# Altium PCB GUASUO2.PcbDoc
Units mm, origin at the board's own origin, x right, y up, seen from the top; angles counter-clockwise.
Board outline 152.4 x 101.6 mm, 2 copper layers (Top Layer, Bottom Layer); 63 components, 53 nets, 213 pads, 187 vias.
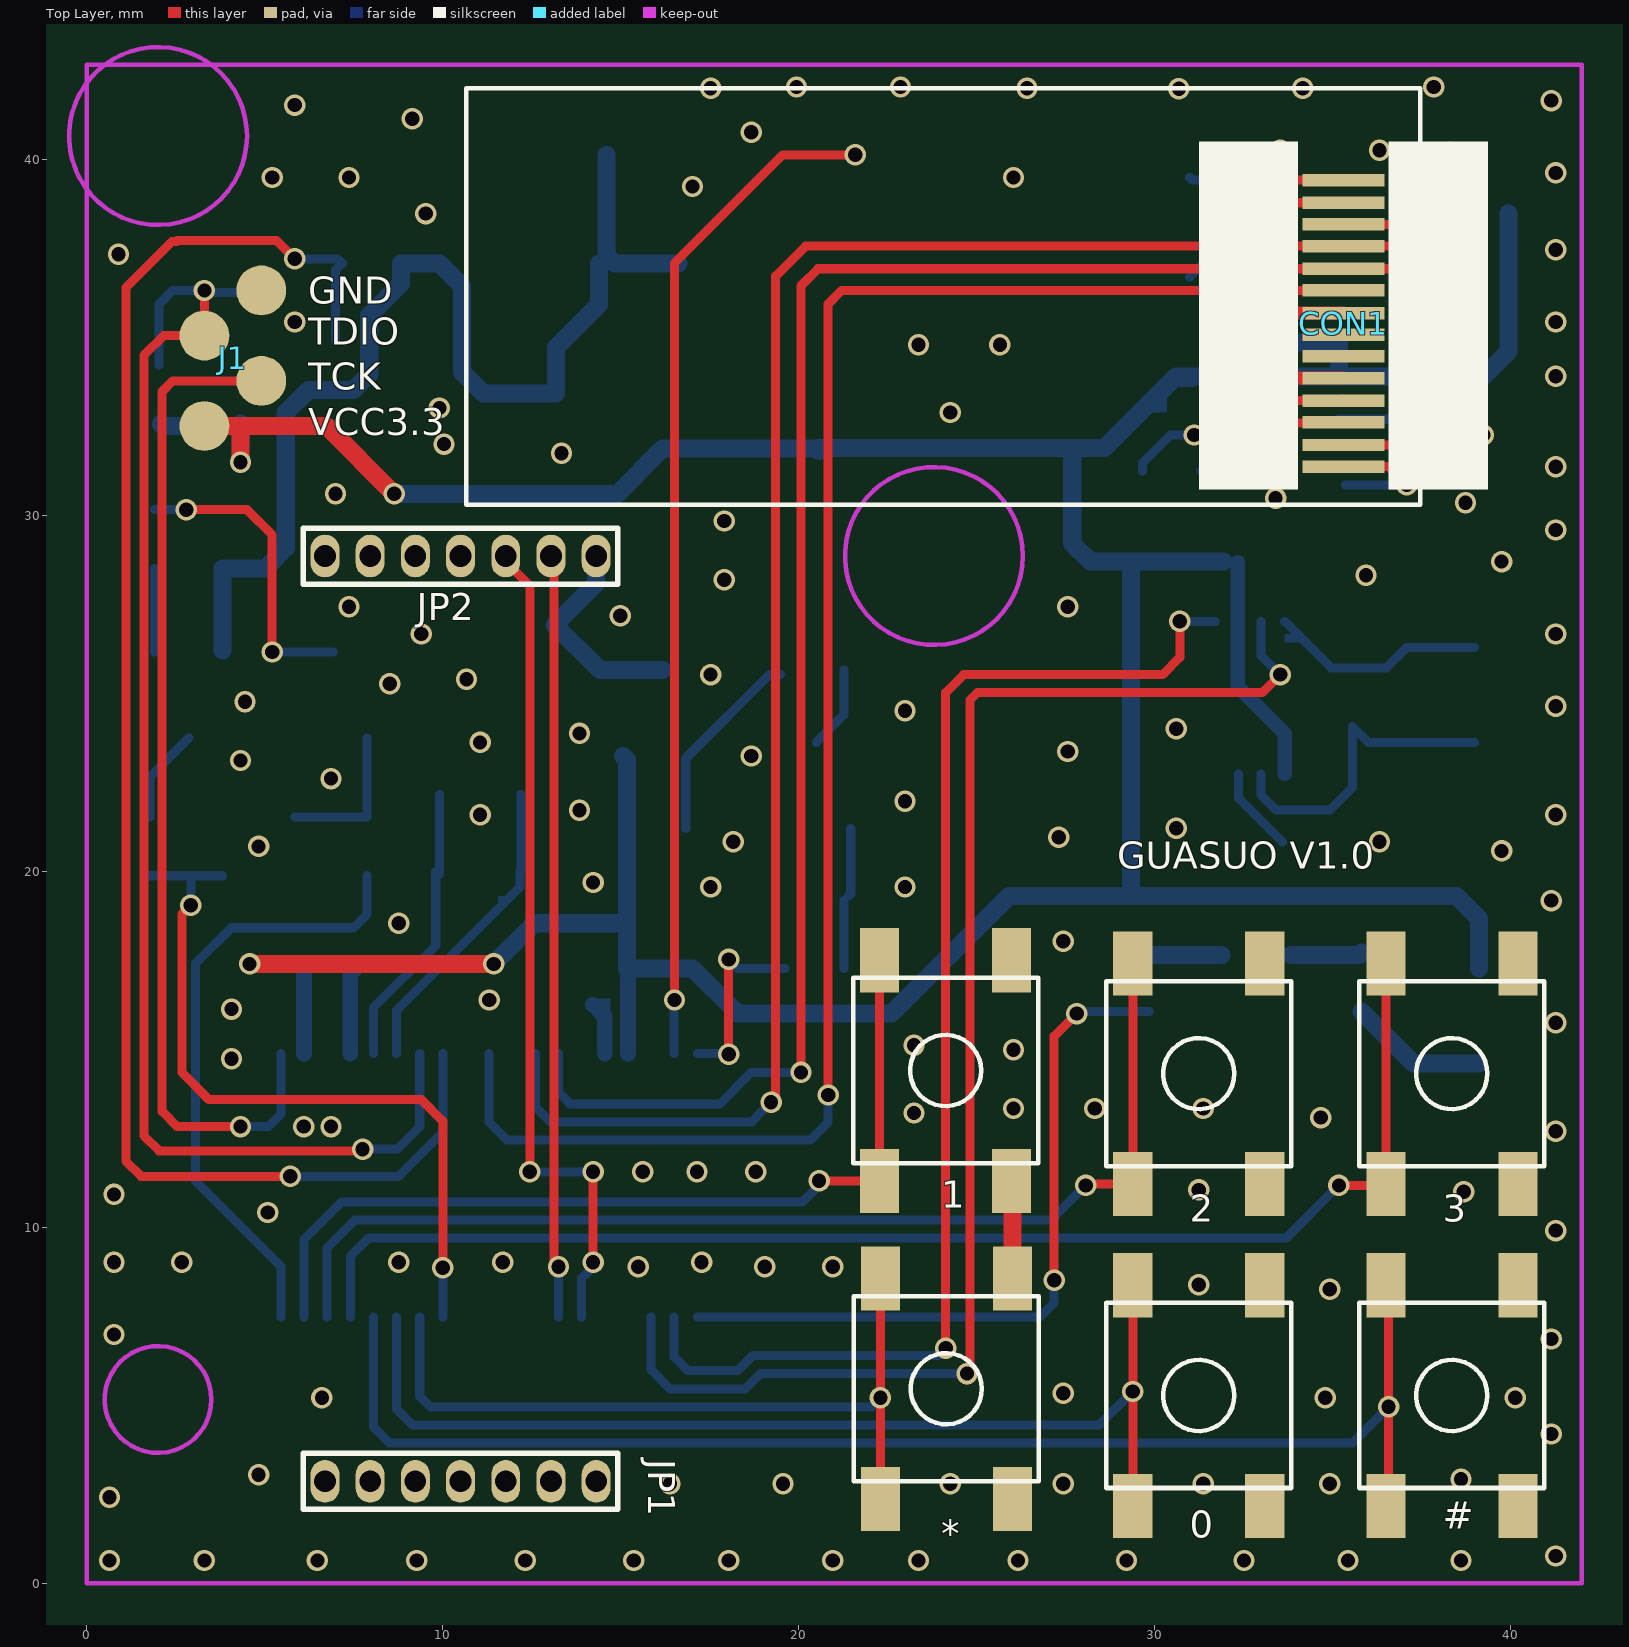
[diagram p0: Top Layer view]
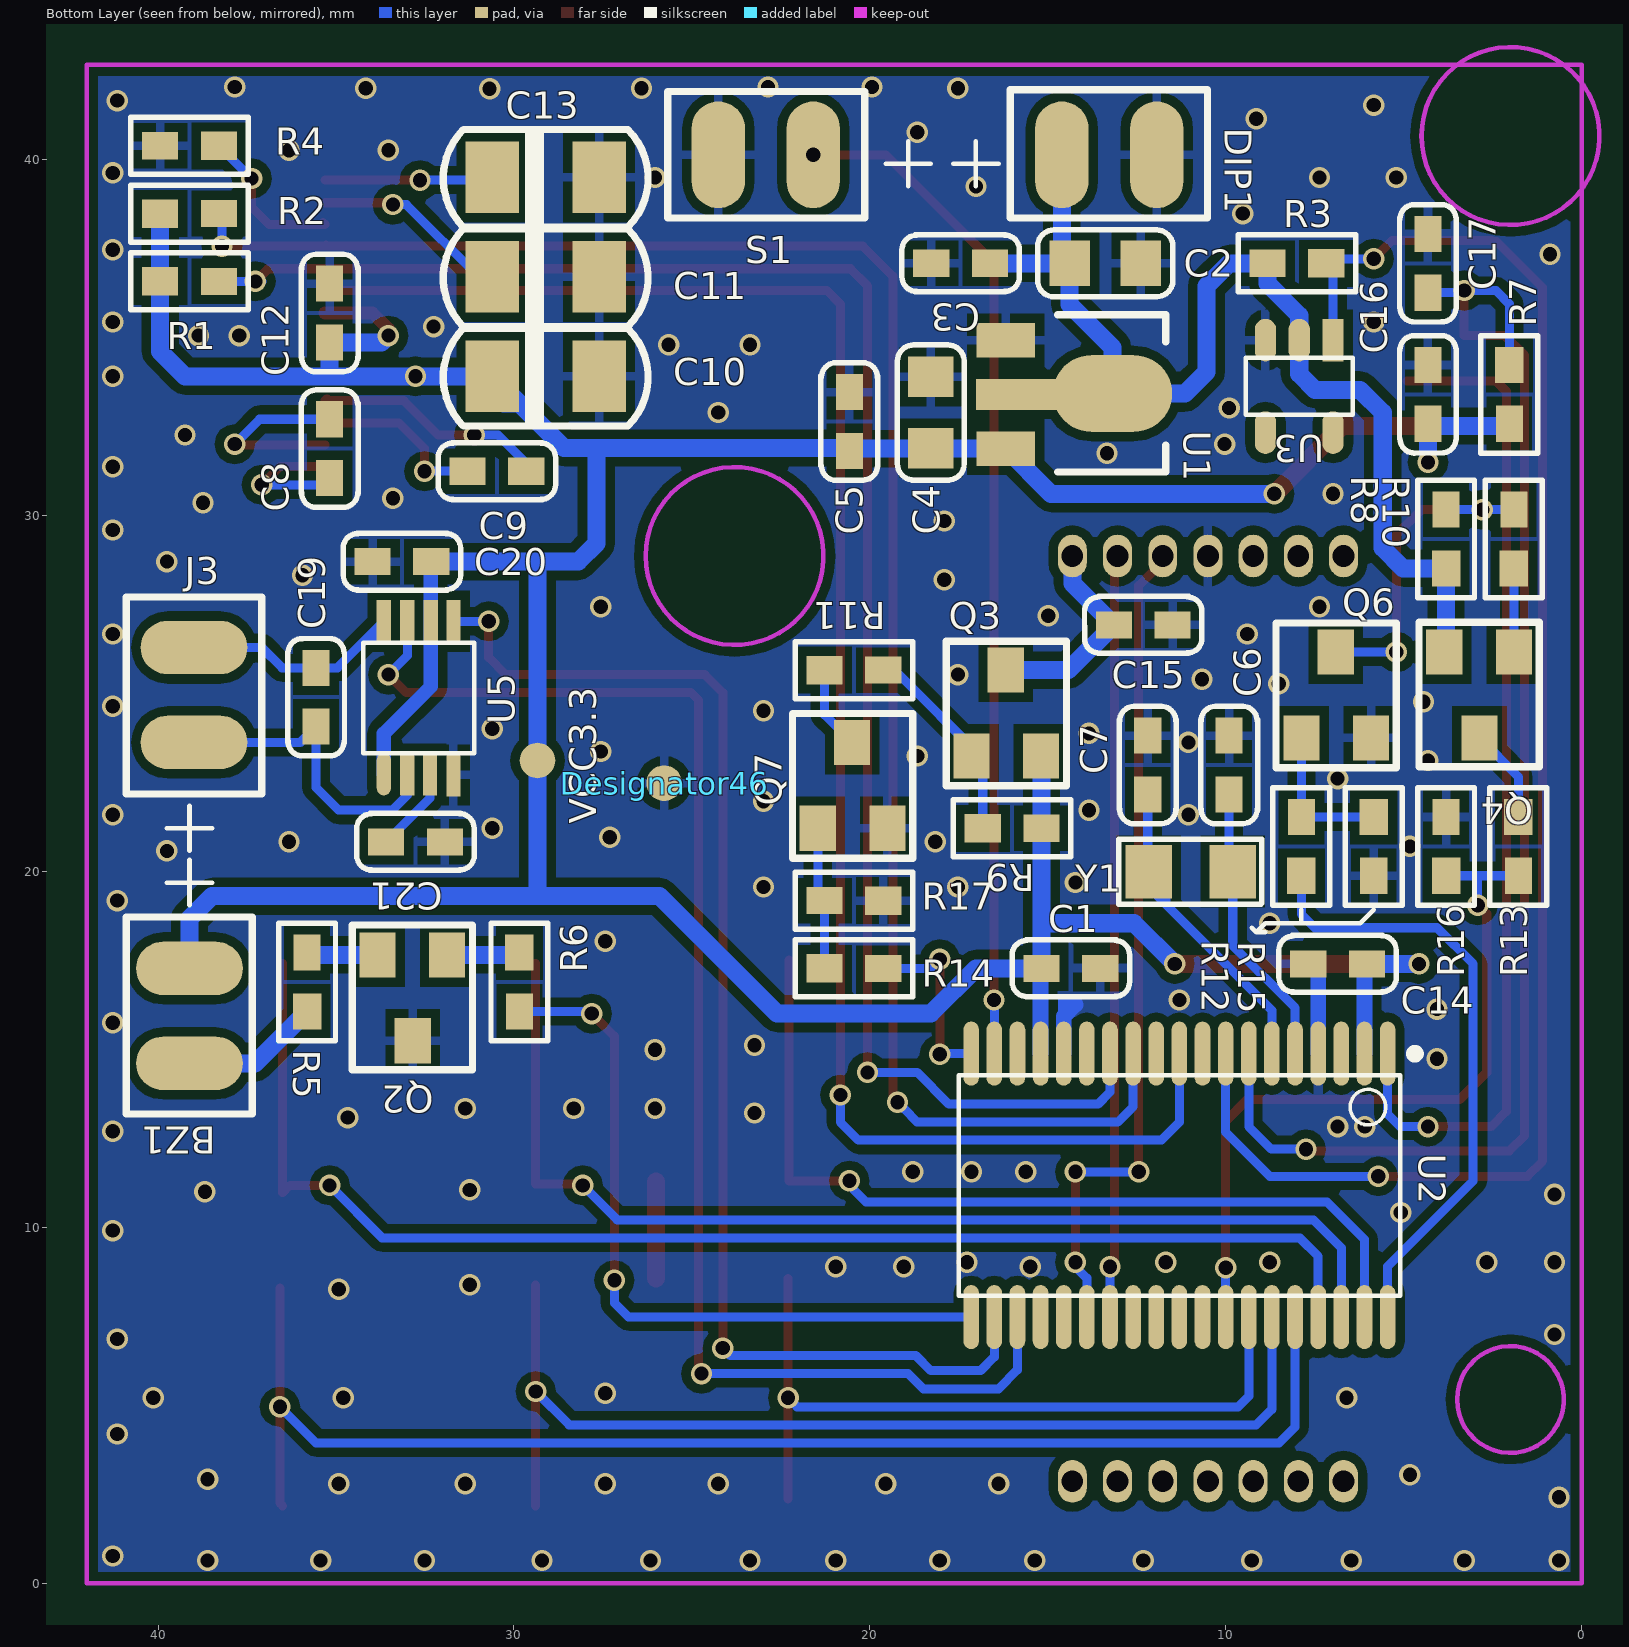
[diagram p1: Bottom Layer view, seen from below]

## Layer stack, top to bottom
Top Solder: solder mask 0.0102, Solder Resist, Dk 3.5
Top Layer: signal copper 0.0356
Dielectric1: dielectric 0.32, FR-4, Dk 4.8
Bottom Layer: signal copper 0.0356
Bottom Solder: solder mask 0.0102, Solder Resist, Dk 3.5

## Board outline
-56.007,-25.4 96.393,-25.4 96.393,76.2 -56.007,76.2

## Design rules (kind name [scope] priority, off if disabled: settings)
Clearance [All] p1: gap=0.254
ComponentClearance [All] p1: gap=0 collisioncheckmode=3 verticalgap=0 showdistances=FALSE
PolygonConnect PolygonConnect_1 [IsVia] p1: connectstyle=Direct reliefconductorwidth=0.254 reliefentries=4 polygonreliefangle="90 Angle" airgapwidth=0.254
PolygonConnect [All] p2: connectstyle=Relief reliefconductorwidth=0.254 reliefentries=4 polygonreliefangle="90 Angle" airgapwidth=0.254
RoutingVias [All] p1: holewidth=0.4 width=0.6 viastyle="Through Hole" minholewidth=0.025 minwidth=0.025 maxholewidth=1.27 maxwidth=1.27
SolderMaskExpansion [All] p1: expansion=0.102
UnpouredPolygon [All] p1: allowunpoured=FALSE
Width [All] p1: maxlimit=1.27 minlimit=0.025 preferedwidth=0.203
28 further rules are at their usual default settings.

## Classes and differential pairs
component class 挂锁-151103: 0 1 2 3 # BZ1 C1 C2 C3 C4 C5 C6 C7 C8 C9 C10 C11 C12 C13 C14 C15 C16 C17 C19 C20 C21 DIP1 J1 J3 JP1 JP2 Q2 Q3 Q4 Q6 Q7 R1 R2 R3 R4 R5 R6 R7 R8 R9 R10 R11 R12 R13 R14 R15 R16 R17 U1 U2 U3 U5 Y1

## Components (designator, comment, footprint, x,y, rotation, side; value= is the part's Value field where it differs from the comment)
0 "SW-PB" TS-030 31.242,5.272 r90 top locked (schematic designator S2)
1 "SW-PB" TS-030 24.13,14.403 r90 top locked (schematic designator S6)
2 "SW-PB" TS-030 31.242,14.314 r90 top locked (schematic designator S5)
3 "SW-PB" TS-030 38.354,14.314 r90 top locked (schematic designator S4)
# "SW-PB" TS-030 38.354,5.272 r90 top locked (schematic designator S3)
* "SW-PB" TS-030 24.151,5.461 r90 top locked (schematic designator S1)
BZ1 "BUZZER" 2PAD-9 39.116,17.272 r270 bottom
C1 "104" 0603C 14.351,17.272 r180 bottom
C2 "10uF" 0805C 13.384,37.084 r180 bottom
C3 "104" 0603C 17.448,37.084 r0 bottom
C4 "10uF" 0805C 18.288,32.893 r90 bottom
C5 "104" 0603C 20.574,32.639 r90 bottom
C6 "15P" 0603C 9.906,22.987 r90 bottom
C7 "15P" 0603C 12.192,22.987 r90 bottom
C8 "1UF" 0603C 35.179,31.877 r90 bottom
C9 "1UF" 0603C 30.48,31.242 r180 bottom
C10 "4.7UF" "10U/16V SMT-A" 30.607,33.909 r180 bottom
C11 "4.7uf" "10U/16V SMT-A" 30.607,36.703 r180 bottom
C12 "1uf" 0603C 35.179,35.687 r90 bottom
C13 "4.7uF" "10U/16V SMT-A" 30.607,39.497 r180 bottom
C14 "104" 0603C 6.858,17.399 r0 bottom
C15 "1UF" 0603c 12.319,26.924 r180 bottom
C16 "1UF" 0603C 4.318,33.401 r90 bottom
C17 "1P" 0603C 4.318,37.084 r90 bottom
C19 "1P" 0603C 35.56,24.892 r270 bottom
C20 "1uF" 0603C 33.147,28.702 r180 bottom
C21 "1uF" 0603C 32.766,20.828 r0 bottom
CON1 "FPC-14PIN-F" OLED-SMD-14 35.306,31.369 r180 bottom locked
Designator46 "Comment" TEST#1 24.765,22.352 r180 top
DIP1 "" 2PAD-9 14.605,40.132 r180 bottom
J1 "4PIN" PAD-1.27-4 3.302,32.512 r90 top
J3 "SIP2" 2PAD-9 38.989,23.622 r90 bottom
JP1 "CON7" PAD-1.27-7 10.5,2.86 r0 top locked
JP2 "CON7" PAD-1.27-7 10.5,28.86 r180 top locked
Q2 "BC857B" SOT-23 31.877,17.653 r0 bottom
Q3 "OA034" SOT-23-2 17.145,23.241 r180 bottom
Q4 "BC857B" SOT-23 1.905,26.162 r0 bottom
Q6 "BC847B" SOT-23 7.874,23.749 r180 bottom
Q7 "BC847B" SOT-23 21.463,21.209 r180 bottom
R1 "4.7K" 0603R 39.116,36.576 r0 bottom
R2 "4.7K" 0603R 39.116,38.481 r0 bottom
R3 "1M" 0603R 8.001,37.084 r180 bottom
R4 "390K" 0603R 39.116,40.386 r180 bottom
R5 "10Ω" 0603R 35.814,16.891 r270 bottom
R6 "1K" 0603R 29.845,16.891 r90 bottom
R7 "47K" 0603R 2.032,33.401 r90 bottom
R8 "47k" 0603R 3.81,29.337 r270 bottom
R9 "10K" 0603R 16.002,21.209 r0 bottom
R10 "30k" 0603R 1.905,29.337 r270 bottom
R11 "4.7K" 0603R 20.447,25.654 r0 bottom
R12 "4.7K" 0603R 7.874,20.701 r270 bottom
R13 "10k" 0603R 1.778,20.701 r90 bottom
R14 "4.7K" 0603R 20.447,17.272 r0 bottom
R15 "100K" 0603R 5.842,20.701 r90 bottom
R16 "30k" 0603R 3.81,20.701 r270 bottom
R17 "100K" 0603R 20.447,19.177 r180 bottom
S1 "SW-SPDT" 2PAD-9 21.59,40.132 r0 bottom
U1 "HT7333" SOT-89 16.178,34.925 r270 bottom
U2 "MSP2755" TSSOP-38 11.303,11.176 r270 bottom
U3 "HT7033A-2" SOT-23-5 6.985,34.925 r270 bottom
U5 "PT5102" MSOP-8 33.655,22.733 r90 bottom
VCC3.3 "Comment" TEST#2 28.067,23.114 r0 bottom
Y1 "32.768K" CRYSTAL_3215 11.303,19.304 r180 bottom

## Footprints (in the part's own frame and the unit in brackets; to place one, negate y for a bottom-side part, rotate by r counter-clockwise, add the part's x,y. Pads: shape width x height; smd on the part's side, far side on the other; paste and mask are expansions set on the pad)
2PAD-9 [mm]
  oval 1.5x3 smd: 1(0,0) 2(2.667,0)
  silkscreen extent -1.45,-1.78 4.09,1.77
"10U/16V SMT-A" [mil]
  rect 59x79 smd: 1(0,0) 2(118.11,0)
  silkscreen extent -54,-55 172,53
0603C [mil]
  rect 40x30 smd: 1(-32.5,0) 2(32.5,0)
  silkscreen extent -65,-31 65,31
0603c [mil]
  rect 40x30 smd: 1(-32.5,0) 2(32.5,0)
  silkscreen extent -65,-31 65,31
0603R [mil]
  rect 40x30 smd: 1(-32.5,0)
  rect 40x31.5 smd: 2(32.5,0)
  silkscreen extent -65,-31 65,31
0805C [mm]
  rect 1.14x1.27 smd: 1(-1,0) 2(1,0)
  silkscreen extent -1.9,-0.94 1.9,0.94
CRYSTAL_3215 [mm]
  rect 1.3x1.5 smd: 1(-0.862,0.685) 2(1.5,0.685)
  silkscreen extent -1.7,-0.23 2.31,1.6
MSOP-8 [mm]
  round 0.4 on Bottom Overlay: 0(1.016,0.152)
  oval 1.2x0.4 smd: 1(0,0)
  rect 1.2x0.4 smd: 2(0,-0.66) 3(0,-1.295) 4(-0.025,-1.956) 5(4.293,-1.956) 6(4.293,-1.321) 7(4.293,-0.66) 8(4.293,0)
  silkscreen extent 0.59,-2.54 3.69,0.57
OLED-SMD-14 [mm]
  rect 2.3x0.35 smd far side: 1(0,0) 2(0,0.61) 3(0,1.245) 4(0,1.854) 5(0,2.489) 6(0,3.099) 7(0,3.708) 8(0,4.318) 9(0,4.953) 10(0,5.563) 11(0,6.198) 12(0,6.807) 13(0,7.417) 14(0,8.052)
PAD-1.27-4 [mm]
  round 1.4 smd: 1(0,0) 2(1.27,-1.6) 3(2.54,0) 4(3.81,-1.6)
PAD-1.27-7 [mil]
  oval 32x47.24 hole 24: 1(-150,0) 2(-100,0) 3(-50,0) 4(0,0) 5(50,0) 6(100,0) 7(150,0)
  silkscreen extent -174,-31 174,31
SOT-23 [mil]
  rect 40x50 smd: B(0,0) C(38,95) E(77,0)
  silkscreen extent -28,-33 105,127
SOT-23-2 [mil]
  rect 40x50 smd: D(38,95) G(0,0) S(77,0)
  silkscreen extent -28,-33 105,127
SOT-23-5 [mm]
  rect 1.2x0.6 smd: 1(0,0)
  oval 1.2x0.6 smd: 2(0,-0.95) 3(0,-1.9) 4(2.6,-1.9) 5(2.6,0)
  silkscreen extent 0.5,-2.45 2.1,0.55
SOT-89 [mil]
  rect 38x65 smd: 1(0,0) 3(120,0)
  rect 34x100 smd: 2(60,17)
  oval 85x132 smd: 4(59,118)
  silkscreen extent -28,57 146,177
TEST#1 [mm]
  round 1 smd far side: 1(-1.016,-0.127)
TEST#2 [mm]
  round 1 smd: 1(1.27,0)
TS-030 [mm]
  rect 1.8x1.1 smd: 1(-3.099,1.854) 2(-3.099,-1.854) 3(3.099,-1.854) 4(3.099,1.854)
  silkscreen extent -2.6,-2.6 2.6,2.6
TSSOP-38 [mm] "TSOP, 38-Leads, Body 12.50x6.10mm, Pitch 0.65mm, IPC Medium Density"
  oval 1.8x0.44 smd: 1(-3.7,5.85) 2(-3.7,5.2) 3(-3.7,4.55) 4(-3.7,3.9) 5(-3.7,3.25) 6(-3.7,2.6) 7(-3.7,1.95) 8(-3.7,1.3) 9(-3.7,0.65) 10(-3.7,0) 11(-3.7,-0.65) 12(-3.7,-1.3) 13(-3.7,-1.95) 14(-3.7,-2.6) 15(-3.7,-3.25) 16(-3.7,-3.9) 17(-3.7,-4.55) 18(-3.7,-5.2) 19(-3.7,-5.85) 20(3.7,-5.85) 21(3.7,-5.2) 22(3.7,-4.55) 23(3.7,-3.9) 24(3.7,-3.25) 25(3.7,-2.6) 26(3.7,-1.95) 27(3.7,-1.3) 28(3.7,-0.65) 29(3.7,0) 30(3.7,0.65) 31(3.7,1.3) 32(3.7,1.95) 33(3.7,2.6) 34(3.7,3.25) 35(3.7,3.9) 36(3.7,4.55) 37(3.7,5.2) 38(3.7,5.85)
  silkscreen extent -3.82,-6.2 3.1,6.74

## Part data
BZ1: "Buzzer"
C1 C2 C3 C4 C5 C6 C7 C12 C14 C15 C16: library part CAP, "Capacitor"
C8 C9 C17 C19 C20 C21: library part "CAP NP_Dup3"
C10 C11 C13: library part CAP_E, "1206"
CON1: library part CON14, "Connector"
DIP1: library part DIP2
J3: library part CON2, "Connector"
JP1 JP2: "Connector"
Q2 Q4: library part PNP, "PNP Transistor"
Q3: library part "MOSFET P"
Q6 Q7: library part NPN, "NPN Transistor"
R1 R2 R4 R7 R8 R9 R10 R11 R12 R13 R14 R15 R16 R17: library part RES
R3: library part res
R5 R6: library part R_Dup3
U1: library part LM117K
U2 U5: library part Component_1
Y1: library part CRYSTAL, "Crystal"

## Via types
v1: diameter 0.6, hole 0.4, Top Layer to Bottom Layer, 187 vias

## Nets (pads, with @x,y where several pads share a name; then routed paths per layer and width w, separated by ;. In a path a pad name is that pad's centre, name@x,y a point inside that pad or via, vN(x,y) a via of type N, cw(c..) or ccw(c..) an arc to the next point about the centre after c; other vN are vias at no path point)
AD: R13.1 R16.2 U2.31 | length 21.1
  Top Layer w0.254: v1(2.921,19.05) 2.667,18.796 2.667,14.351 3.429,13.589 9.398,13.589 10.003,12.984 v1(10.003,8.86)
  Bottom Layer w0.254: R13.1 2.921,19.875 ; v1(2.921,19.05) 2.921,19.875 ; R16.2 2.921,19.875 ; U2.31 v1(10.003,8.86)
AJ2: *.1 *.4 U2.32 | length 21.6
  Top Layer w0.254: *.1 v1(22.296,5.207) *.4
  Bottom Layer w0.254: U2.32 9.353,5.252 9.652,4.953 22.042,4.953 v1(22.296,5.207)
AJ3: 0.1 0.4 U2.33 | length 30
  Top Layer w0.254: 0.1 v1(29.388,5.385) 0.4
  Bottom Layer w0.254: U2.33 8.703,4.886 9.144,4.445 28.448,4.445 v1(29.388,5.385)
AJ4: #.1 #.4 U2.34 | length 38.4
  Top Layer w0.254: #.1 36.576,2.249 v1(36.576,4.953) #.4@36.576,8.294
  Bottom Layer w0.254: U2.34 8.053,4.393 8.509,3.937 35.56,3.937 v1(36.576,4.953)
AJ5: 3.1 3.4 U2.35 | length 40.1
  Top Layer w0.254: v1(35.179,11.176) 36.297,11.176 36.5,10.973 3.1 3.4
  Bottom Layer w0.254: U2.35 7.403,9.181 7.92,9.698 33.701,9.698 ; v1@35.052,11.049 33.701,9.698 ; v1(35.179,11.176) 33.701,9.698
AJ6: 2.1 2.4 U2.36 | length 31.5
  Top Layer w0.254: v1@28.106,11.215 2.1 2.4
  Bottom Layer w0.254: U2.36 6.753,9.42 7.539,10.206 27.097,10.206 v1(28.067,11.176)
AJ7: 1.1 1.4 U2.37 | length 25
  Top Layer w0.254: v1(20.575,11.304) 1.1 1.4
  Bottom Layer w0.254: U2.37 6.103,9.659 7.158,10.714 20.112,10.714 v1@20.447,11.049
DC+: U2.22 U5.7 | length 40.7
  Top Layer w0.254: v1@24.73,5.715 v1(24.73,5.888) 24.811,5.969 24.811,24.811 25.019,25.019 33.02,25.019 v1(33.528,25.527)
  Bottom Layer w0.254: U2.22 15.853,5.991 16.383,5.461 18.498,5.461 18.925,5.888 v1(24.73,5.888) v1@24.811,5.969 ; U5.7 32.995,26.06 v1(33.528,25.527)
DC-: U2.21 U5.5 | length 36.6
  Top Layer w0.254: v1(24.13,6.604) 24.13,25.019 24.638,25.527 30.226,25.527 30.709,26.01 v1(30.709,27.026)
  Bottom Layer w0.254: U2.21 16.503,6.357 16.891,5.969 18.288,5.969 18.715,6.396 23.922,6.396 v1(24.13,6.604) ; v1(30.709,27.026) U5.5
FVCC: C15.1 JP2.1 Q3.D | length 6
  Bottom Layer w0.508: JP2.1 14.31,28.09 C15.1 14.414,25.654 Q3.D
GND: 0.2 0.3 1.2 1.3 2.2 2.3 3.2 3.3 #.2 #.3 *.2 *.3 C1.2 C2.2 C3.2 C4.2 C5.2 C6.2 C7.2 C10.2 C11.2 C12.2 C13.2 C14.2 C15.2 C16.2 C17.2 C20.1 C21.1 CON1.7 Designator46.1 DIP1.2 J1.4 JP2.4 Q2.C Q6.E Q7.E R4.1 R15.1 R16.1 R17.2 S1.2 U1.1 U2.4 U2.15 U3.3 U5.4 | length 6.9
  Top Layer w0.508: *.3 1.2@26.005,11.283
  Bottom Layer w0.44: U2.4 7.403,17.119 C14.2 ; 14.219,16.256 14.553,15.922 U2.15
  other v1: 0.635,0.635 3.302,0.635 6.477,0.635 9.271,0.635 12.319,0.635 15.367,0.635 18.034,0.635 20.955,0.635 23.368,0.635 26.162,0.635 29.21,0.635 32.512,0.635 35.433,0.635 38.608,0.635 41.275,0.762 0.635,2.413 16.383,2.794 19.558,2.794 24.257,2.794 27.432,2.794 31.369,2.794 34.925,2.794 38.608,2.921 4.826,3.048 41.148,4.191 6.604,5.207 34.798,5.207 40.132,5.207 27.432,5.334 41.148,6.858 0.762,6.985 34.925,8.255 31.242,8.382 15.494,8.89 19.05,8.89 20.955,8.89 0.762,9.017 2.667,9.017 8.763,9.017 11.684,9.017 17.272,9.017 41.275,9.906 5.08,10.414 0.762,10.922 38.684,10.998 31.242,11.049 15.621,11.557 17.145,11.557 18.796,11.557 41.275,12.7 6.096,12.827 6.858,12.827 34.671,13.081 23.241,13.208 26.035,13.335 28.321,13.335 31.369,13.335 4.064,14.732 26.035,14.986 23.241,15.113 41.275,15.748 4.064,16.129 11.303,16.383 27.432,18.034 8.763,18.542 41.148,19.177 17.526,19.558 22.987,19.558 14.224,19.685 39.751,20.574 4.826,20.701 18.161,20.828 36.322,20.828 27.305,20.955 30.607,21.209 11.049,21.59 41.275,21.59 13.843,21.717 22.987,21.971 6.858,22.606 4.318,23.114 18.669,23.241 27.559,23.368 11.049,23.622 13.843,23.876 30.607,24.003 22.987,24.511 41.275,24.638 4.445,24.765 8.509,25.273 10.668,25.4 17.526,25.527 9.398,26.67 41.275,26.67 14.986,27.178 7.366,27.432 27.559,27.432 17.907,28.194 35.941,28.321 39.751,28.702 41.275,29.591 17.907,29.845 38.735,30.353 33.401,30.48 6.985,30.607 41.275,31.369 13.335,31.75 10.033,32.004 39.243,32.258 24.257,32.893 9.906,33.02 41.275,33.909 23.368,34.798 25.654,34.798 37.719,35.052 38.862,35.052 32.258,35.306 5.842,35.433 41.275,35.433 0.889,37.338 41.275,37.465 9.525,38.481 17.018,39.243 5.207,39.497 7.366,39.497 26.035,39.497 41.275,39.624 33.528,40.259 36.322,40.259 18.669,40.767 9.144,41.148 5.842,41.529 41.148,41.656 30.683,41.986 17.526,42.002 26.416,42.002 34.163,42.002 19.939,42.037 22.86,42.037 37.846,42.037
LCDRES: CON1.9 U2.10 | length 50
  Top Layer w0.254: v1(20.828,13.716) 20.828,35.941 21.209,36.322 33.909,36.322 ; 33.401,36.322 33.909,36.322 ; CON1.9 33.909,36.322
  Bottom Layer w0.254: U2.10 11.303,12.954 11.811,12.446 20.32,12.446 20.828,12.954 v1(20.828,13.716)
LOWBAT: R3.2 U2.8 U3.1 | length 45.5
  Top Layer w0.254: v1(5.715,11.43) 1.524,11.43 1.097,11.857 1.097,36.403 2.395,37.701 2.52,37.701 2.538,37.719 5.334,37.719 v1(5.842,37.211)
  Bottom Layer w0.254: v1(5.715,11.43) 8.763,11.43 10.003,12.67 U2.8 ; v1(5.842,37.211) 7.048,37.211 R3.2 6.985,36.893 U3.1
NetBZ1_2: BZ1.2 R5.2 | length 3.9
  Bottom Layer w0.508: R5.2 37.274,14.605 BZ1.2
NetC6_1: C6.1 U2.5 Y1.2 | length 8.1
  Bottom Layer w0.254: U2.5 8.053,16.162 9.803,17.912 Y1.2 ; Y1.2@9.906,19.915 C6.1
NetC7_1: C7.1 U2.6 Y1.1 | length 8.7
  Bottom Layer w0.254: U2.6 8.703,16.094 12.165,19.556 Y1.1 ; Y1.1@12.192,20.016 C7.1
NetC8_1: C8.1 CON1.1 | length 3.7
  Top Layer w0.254: CON1.1 36.576,31.369 v1(37.084,30.861)
  Bottom Layer w0.254: C8.1@35.369,30.861 v1(37.084,30.861)
NetC8_2: C8.2 CON1.2 | length 7.4
  Top Layer w0.254: 37.186,31.979 CON1.2 v1@37.821,31.979
  Bottom Layer w0.254: C8.2 37.148,32.703 v1(37.846,32.004)
NetC9_1: C9.1 CON1.3 | length 4.9
  Top Layer w0.254: v1(32.512,31.242) 32.512,31.877 33.228,32.593 35.285,32.593 CON1.3
  Bottom Layer w0.254: C9.1 v1(32.512,31.242)
NetC9_2: C9.2 CON1.4 | length 6.7
  Top Layer w0.254: v1(31.115,32.258) 32.131,32.258 33.096,33.223 CON1.4 CON1.4@35.255,33.274
  Bottom Layer w0.254: C9.2 29.654,31.471 30.442,32.258 v1(31.115,32.258)
NetC11_1: C11.1 CON1.13 | length 5.1
  Top Layer w0.254: v1@33.452,38.786 CON1.13
  Bottom Layer w0.254: C11.1@30.988,36.703 33.02,38.735 v1(33.401,38.735)
NetC13_1: C13.1 CON1.14 | length 4.3
  Top Layer w0.254: v1(32.639,39.421) CON1.14
  Bottom Layer w0.254: C13.1@30.988,39.497 31.064,39.421 v1(32.639,39.421)
NetC19_1: C19.1 J3.2 U5.8 | length 6.1
  Bottom Layer w0.254: U5.8 34.963,25.717 C19.1 36.512,25.717 37.084,26.289 J3.2
NetC19_2: C19.2 J3.1 U5.2 | length 8.9
  Bottom Layer w0.254: U5.2 32.995,22.143 33.421,21.717 34.925,21.717 35.56,22.352 C19.2 36.005,23.622 J3.1
NetC21_2: C21.2 U5.3 | length 2.4
  Bottom Layer w0.254: U5.3 32.36,22.06 C21.2
NetCON1_12: CON1.12 R4.2 | length 4.4
  Top Layer w0.254: CON1.12@35.36,38.23 CON1.12 36.886,38.176 37.37,38.661 v1(37.37,39.466)
  Bottom Layer w0.254: v1(37.37,39.466) R4.2
NetD1_2: 
NetJ2_1: 
NetJ2_2: 
NetQ2_B: Q2.B R6.2 | length 2
  Bottom Layer w0.508: R6.2@29.909,17.653 Q2.B
NetQ2_E: Q2.E R5.1 | length 2
  Bottom Layer w0.508: Q2.E 35.75,17.653 R5.1
NetQ3_G: Q3.G R9.2 R11.1 | length 5.6
  Bottom Layer w0.254: R9.2 16.828,23.177 16.891,23.241 19.177,25.527 R11.1@19.495,25.527
NetQ4_B: Q4.B R10.2 | length 2.3
  Bottom Layer w0.254: Q4.B R10.2
NetQ4_C: Q4.C R13.2 | length 2.7
  Bottom Layer w0.254: R13.2 1.778,22.657 Q4.C
NetQ6_B: Q6.B R12.1 R15.2 | length 4.3
  Bottom Layer w0.254: R15.2 R12.1 Q6.B
NetQ6_C: Q6.C R8.1 R10.1 | length 9.6
  Top Layer w0.254: v1(2.794,30.162) 4.499,30.162 5.207,29.455 v1(5.207,26.162)
  Bottom Layer w0.254: R10.1 v1(2.794,30.162) R8.1 ; v1(5.207,26.162) Q6.C
NetQ7_B: Q7.B R14.2 R17.1 | length 3.8
  Bottom Layer w0.254: R14.2 R17.1 ; R17.1@21.399,19.304 21.463,19.367 Q7.B
NetQ7_C: Q7.C R11.2 | length 2.4
  Bottom Layer w0.254: Q7.C 21.273,24.397 R11.2
NetS1_1: S1.1 U2.18 | length 28.5
  Top Layer w0.254: v1(16.51,16.383) 16.51,37.084 19.558,40.132 v1(21.59,40.132)
  Bottom Layer w0.254: U2.18 v1@16.503,16.376
P4.7: R12.2 U2.38 | length 17.4
  Bottom Layer w0.254: U2.38 5.453,8.898 3.048,11.303 3.048,17.399 4.064,18.415 7.493,18.415 7.874,18.796 R12.2
PW_CTR: R14.1 U2.19 | length 5.2
  Top Layer w0.254: v1(18.034,14.859) v1(18.034,17.526)
  Bottom Layer w0.254: U2.19 18.017,14.876 v1(18.034,14.859) ; v1(18.034,17.526) 18.288,17.272 R14.1
RX: JP2.2 U2.26 | length 21.5
  Top Layer w0.254: JP2.2 13.127,28.773 13.127,9.016 v1(13.253,8.89)
  Bottom Layer w0.254: U2.26 v1(13.253,8.89)
RX-MCU: 
SB_TCK: J1.2 U2.1 | length 28.5
  Top Layer w0.254: v1(4.318,12.827) 2.54,12.827 2.113,13.254 2.113,33.482 2.413,33.782 J1.2
  Bottom Layer w0.254: v1(4.318,12.827) 5.103,12.827 5.453,13.177 U2.1
SB_TDIO: C17.1 J1.3 R7.2 U2.7 | length 39.6
  Top Layer w0.254: v1(3.302,36.322) J1.3 2.159,35.052 1.605,34.498 1.605,12.573 2.032,12.146 7.701,12.146 v1(7.747,12.192)
  Bottom Layer w0.254: R7.2 2.032,35.941 2.413,36.322 v1(3.302,36.322) 3.365,36.258 C17.1 ; v1(7.747,12.192) 8.718,12.192 9.353,12.827 U2.7
SCL: CON1.10 R1.1 U2.13 | length 49.8
  Top Layer w0.254: v1(20.066,14.351) 20.066,36.449 ; 20.447,36.83 20.066,36.449 ; v1(37.264,36.576) 36.908,36.932 CON1.10 20.549,36.932 20.066,36.449
  Bottom Layer w0.254: U2.13 13.253,13.798 13.589,13.462 17.78,13.462 18.669,14.351 v1(20.066,14.351) ; v1@37.084,36.576 v1(37.264,36.576) R1.1
SDA: CON1.11 R2.1 U2.12 | length 53.4
  Top Layer w0.254: v1(19.225,13.51) 19.35,13.635 19.35,36.724 20.193,37.567 CON1.11 ; CON1.11@35.281,37.592 CON1.11 ; 37.084,37.567 CON1.11 ; v1(38.202,37.567) CON1.11
  Bottom Layer w0.254: U2.12 12.603,13.391 13.04,12.954 18.669,12.954 v1@19.039,13.324 ; v1(38.202,37.567) R2.1@38.202,38.392
SPK_PD0: R6.1 U2.20 | length 20.6
  Top Layer w0.254: v1@27.213,8.509 v1(27.178,8.509) 27.178,15.367 v1(27.813,16.002)
  Bottom Layer w0.254: U2.20 26.78,7.476 27.178,7.874 v1(27.178,8.509) ; v1@27.877,16.066 R6.1
TX: JP2.3 U2.25 | length 23.7
  Top Layer w0.254: JP2.3 11.77,28.702 12.446,28.026 v1(12.446,11.557) v1@12.446,11.43 ; v1(14.224,9.017) v1(14.224,11.557)
  Bottom Layer w0.254: v1(12.446,11.557) v1(14.224,11.557) ; U2.25 13.903,8.569 14.224,8.89 v1(14.224,9.017)
TX-MCU: 
VCC: C2.1 C3.1 DIP1.1 Q4.E R3.1 R8.2 U1.2 U1.4 U3.2 | length 30.8
  Bottom Layer w0.508: Q4.E@3.81,26.213 R8.2 5.016,28.511 5.588,29.083 5.588,32.893 6.223,33.528 7.493,33.528 7.935,33.97 U3.2 7.935,35.621 8.826,36.512 R3.1 9.906,37.084 10.541,36.449 10.541,34.036 11.151,33.426 U1.4 13.181,34.72 14.384,35.924 C2.1 ; DIP1.1 14.605,37.305 14.826,37.084 C3.1
VCC3.3: BZ1.1 C1.1 C4.1 C5.1 C10.1 C12.1 C14.1 C16.1 C20.2 CON1.5 CON1.8 J1.1 Q3.S R1.2 R2.2 R7.1 R9.1 U1.3 U2.2 U2.16 U5.1 U5.6 VCC3.3.1 | length 129.1
  Top Layer w0.36: v1(32.766,33.909) 32.817,33.858 CON1.5 ; v1@33.528,35.238 33.976,35.686 CON1.8
  Top Layer w0.508: J1.1 4.318,32.512 ; v1(4.318,31.496) 4.318,32.512 ; v1@4.699,17.399 v1(11.43,17.399) ; v1(8.636,30.607) 6.731,32.512 4.318,32.512
  Bottom Layer w0.35: C10.1@30.988,33.909 C10.1@31.039,33.858
  Bottom Layer w0.36: 39.941,36.131 R1.2 R1.2@39.941,36.322
  Bottom Layer w0.4: C20.2@32.334,28.689 U5.6 32.334,25.197 33.655,23.876 U5.1
  Bottom Layer w0.44: U2.2 C14.1@6.103,17.074 ; U2.16 C1.1@15.203,16.992
  Bottom Layer w0.508: R7.1@2.078,32.575 2.141,32.512 4.255,32.512 C16.1 v1(4.318,31.496) ; v1(4.572,17.399) C14.1 ; v1(8.636,30.607) 14.908,30.607 U1.3 C5.1@20.511,31.877 ; v1(11.43,17.399) 12.573,18.542 15.176,18.542 ; Q3.S@15.062,23.241 15.176,23.127 R9.1 15.176,18.542 ; C5.1 20.574,31.895 27.686,31.895 ; C10.1@30.658,33.858 C10.1@31.039,33.858 ; C20.2@31.941,28.702 29.337,28.702 ; v1(33.528,35.052) 33.718,34.861 C12.1 35.179,33.909 ; BZ1.1 39.116,18.669 38.481,19.304 29.21,19.304 ; R2.2 R1.2 39.941,34.608 39.243,33.909 35.179,33.909 ; 15.176,18.542 C1.1 17.018,17.272 18.288,16.002 22.606,16.002 25.908,19.304 29.21,19.304 ; 27.686,31.895 27.686,29.21 28.194,28.702 29.337,28.702 ; 27.686,31.895 28.593,31.895 C10.1 30.988,33.909 v1(32.766,33.909) 35.179,33.909 ; 29.21,19.304 29.337,19.431 VCC3.3.1 29.337,28.702
YY: U2.3
pads on no net: CON1.6 JP1.1 JP1.2 JP1.3 JP1.4 JP1.5 JP1.6 JP1.7 JP2.5 JP2.6 JP2.7 U2.9 U2.11 U2.14 U2.17 U2.23 U2.24 U2.27 U2.28 U2.29 U2.30 U3.4 U3.5 U5.0

## Polygon pours and split planes (outlines as drawn)
GND on Bottom Layer "Top Layer-No Net" (solid, remove dead copper, pour order 4): 0,42.66 0,0 42,0 42,42.66

## Keep-outs
Keep-Out Layer:
  circle w0.127: c2,5.16 r1.5
  circle w0.127: c23.8,28.86 r2.5
  circle w0.127: c2,40.66 r2.5
  lines w0.127: 0,0 0,42.66 42,42.66 42,0 0,0

## Other copper
Bottom Layer:
  rectangle net NetC19_1: 33.655,26.425 34.163,26.67
  rectangle net NetC7_1: 11.557,19.075 11.811,19.304
  rectangle net VCC3.3: 29.845,32.893 30.353,33.274
  rectangle net GND: 14.219,16.002 14.72,16.421

## Silkscreen, mask and mechanical layers (free items; w line width, h text height)
Top Overlay:
  rectangle: 36.576,30.734 39.37,40.513
  rectangle: 31.242,30.734 34.036,40.513
  lines w0.013: 10.664,41.835 10.664,30.335 37.264,30.335
  text "GND" at 6.223,35.941 h0.76
  text "TDIO" at 6.223,34.798 h0.76
  text "TCK" at 6.223,33.528 h0.76
  text "VCC3.3" at 6.223,32.258 h0.76
  text "GUASUO V1.0" at 28.956,20.066 h0.76
Bottom Overlay:
  lines w0.127: 5.842,18.923 6.223,18.542 8.89,18.542 9.144,18.288 ; 7.874,18.542 7.874,18.923 ; 8.89,18.288 9.144,18.288 ; 9.271,18.415 9.144,18.288 ; 16.383,39.878 17.653,39.878 ; 17.018,39.243 17.018,40.513 ; 18.288,39.878 19.558,39.878 ; 18.923,39.243 18.923,40.513 ; 38.481,19.685 39.751,19.685 ; 38.481,21.209 39.751,21.209 ; 39.116,19.05 39.116,20.32 ; 39.116,20.574 39.116,21.844
Mechanical 1:
  circle w0.127: c2,40.66 r1.5
  circle w0.127: c23.8,28.86 r1.5
  circle w0.127: c2,5.16 r1.5
  lines w0.127: 0,0 0,42.66 42,42.66 42,0 0,0